# Altium PCB Gyrophare-CarteDeCommande.PCBDOC
Units mm, origin at the board's own origin, x right, y up, seen from the top; angles counter-clockwise.
Board outline 299.72 x 199.9 mm, 2 copper layers (Top Layer, Bottom Layer); 39 components, 43 nets, 144 pads, 42 vias.
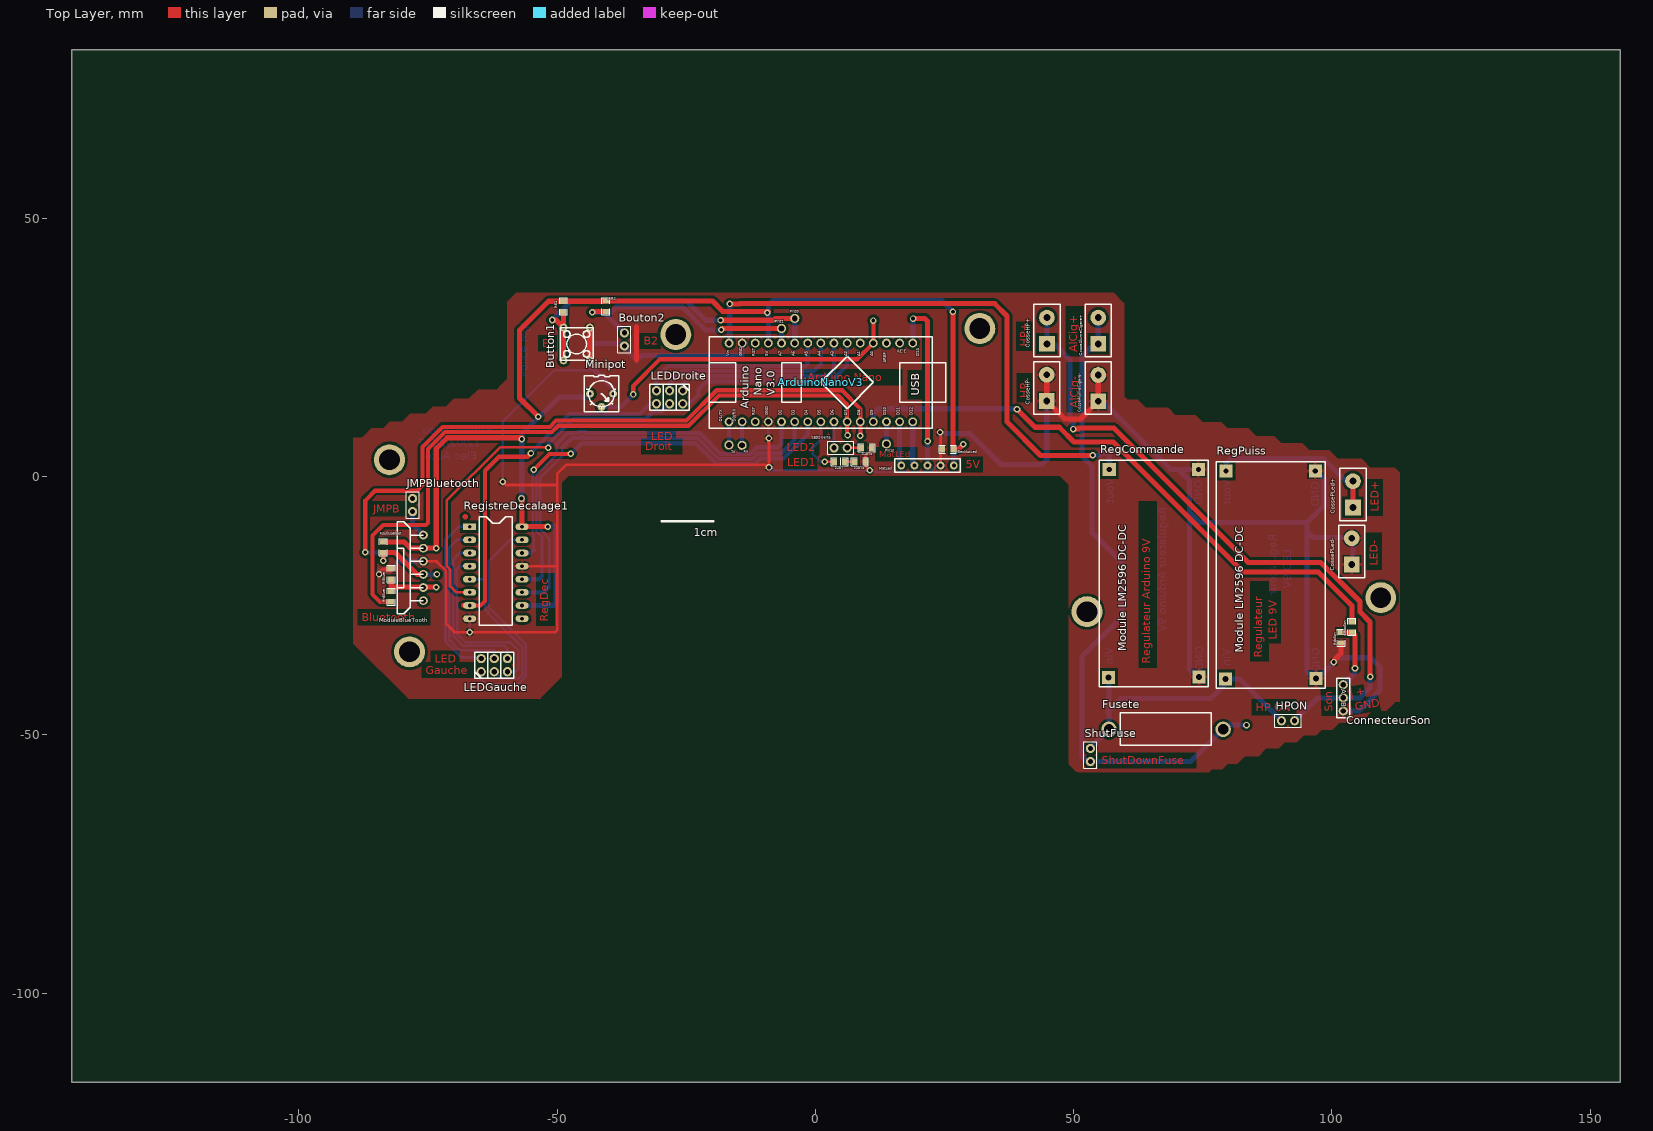
[diagram p0: Top Layer view]
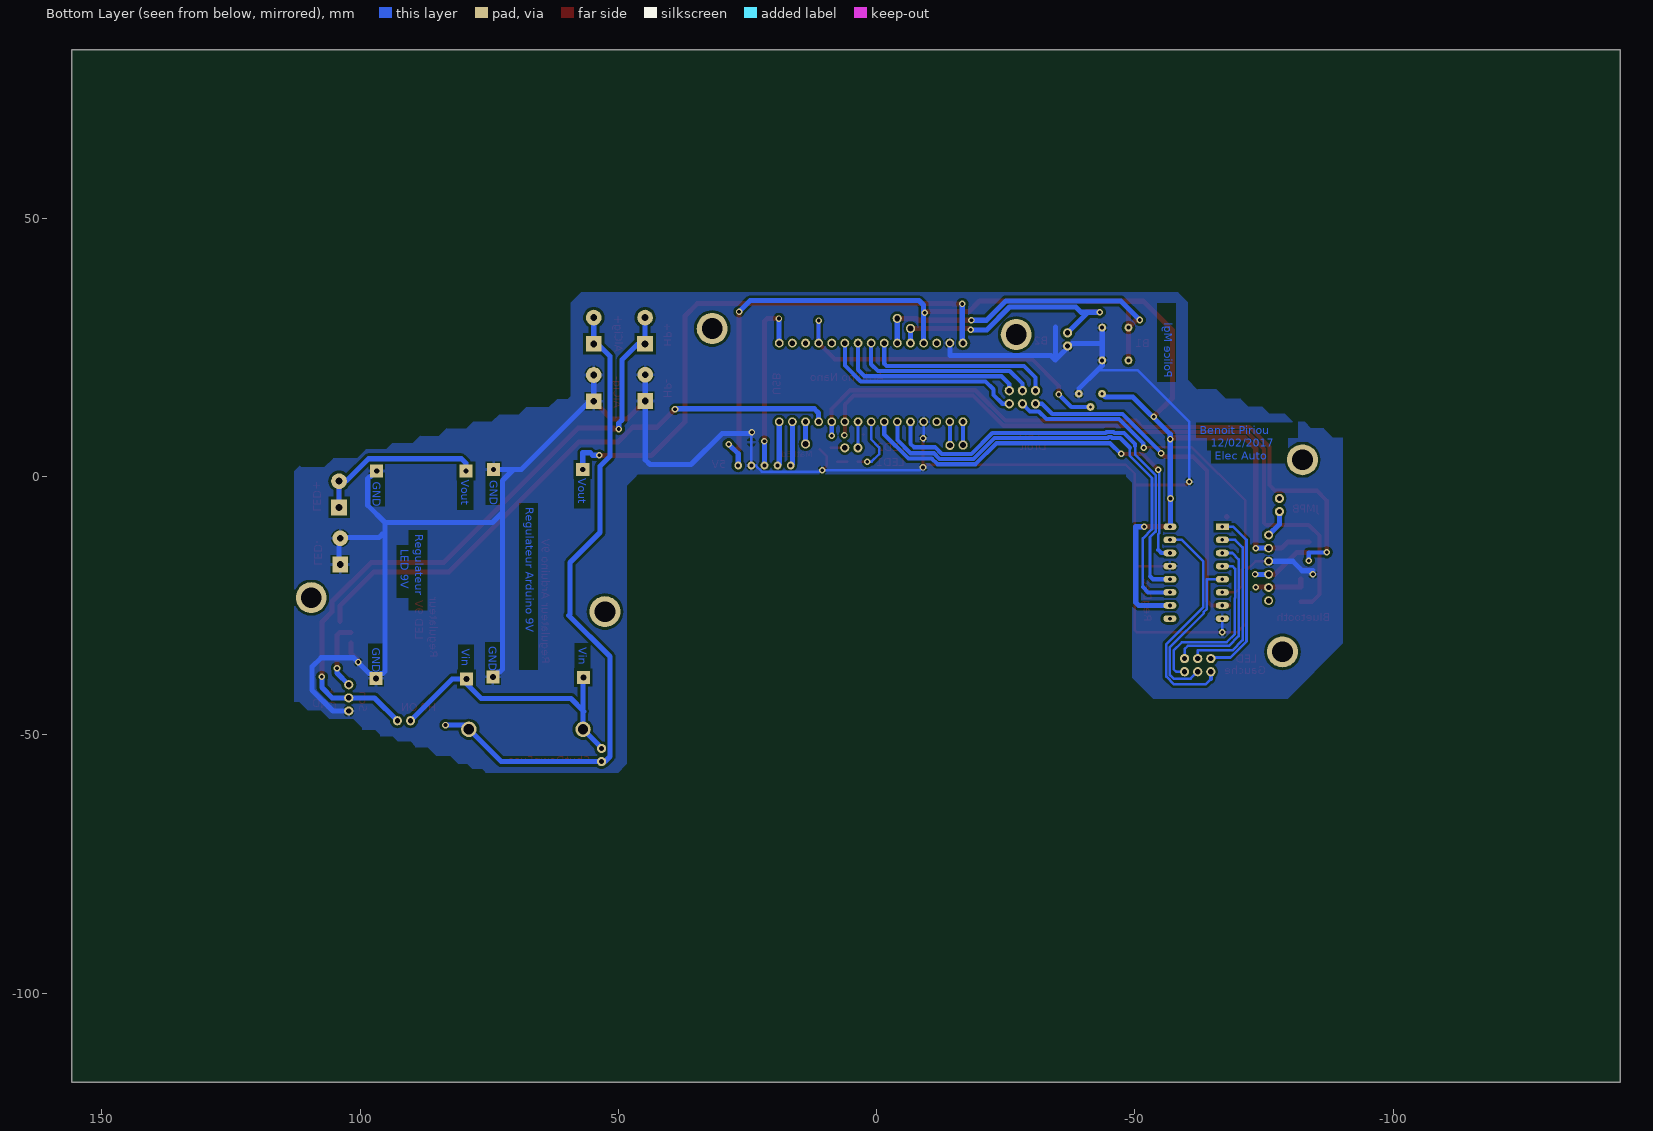
[diagram p1: Bottom Layer view, seen from below]

## Layer stack, top to bottom
Top Solder: solder mask 0.0102, Solder Resist, Dk 3.5
Top Layer: signal copper 0.0356
Dielectric1: dielectric 0.32, FR-4, Dk 4.8
Bottom Layer: signal copper 0.0356
Bottom Solder: solder mask 0.0102, Solder Resist, Dk 3.5

## Board outline
-143.936,-117.276 155.784,-117.276 155.784,82.622 -143.936,82.622

## Design rules (kind name [scope] priority, off if disabled: settings)
Clearance Clearance_bottom_polygon [OnLayer('Bottom Layer') Or OnLayer('Multi-Layer') vs OnLayer('Bottom Layer')  And  InPoly] p1: gap=0.508
Clearance Clearance_top_polygon [OnLayer('Top Layer')  Or OnLayer('Multi-Layer') vs OnLayer('Top Layer') And InPoly] p2: gap=0.508
Clearance Clearance_bottom [OnLayer('Bottom Layer') Or OnLayer('Multi-Layer') vs OnLayer('Bottom Layer')  And Not InPoly] p3: gap=0.203
Clearance Clearance_top [OnLayer('Top Layer')  Or OnLayer('Multi-Layer') vs OnLayer('Top Layer') And Not InPoly] p4: gap=0.203
Clearance Clearance_pad_to_pad [OnLayer('Multi-Layer') vs OnLayer('Multi-Layer')] p5: gap=0.254
ComponentClearance ComponentClearance_bottom [OnLayer('Bottom Overlay') vs OnLayer('Bottom Overlay')] p1: gap=0 collisioncheckmode=3 verticalgap=0.254 showdistances=FALSE
ComponentClearance ComponentClearance_top [OnLayer('Top Overlay') vs OnLayer('Top Overlay')] p2: gap=0 collisioncheckmode=3 verticalgap=0.254 showdistances=FALSE
FabricationTestPointUsage TestPointUsage [All] p1: valid=0 allowmultiple=FALSE
FabricationTestpoint Testpoint [All] p1: side=3 testpointundercomponent=TRUE minsize=1.016 maxsize=2.54 preferedsize=1.524 minholesize=0 maxholesize=1.016 preferedholesize=0.813 testpointgrid=0.025 allowsidetop=TRUE allowsidebottom=TRUE usegrid=TRUE gridtolerance=0
HoleSize [All] p1: absolutevalues=TRUE maxlimit=25.4 minlimit=0.406 maxpercent=80.000 minpercent=20.000
MinimumAnnularRing [PadXSize_AllLayers = PadYSize_AllLayers] p1: minimumring=0.254
PermittedLayers [All] p1: toplayerpermitted=TRUE bottomlayerpermitted=TRUE
PolygonConnect [All] p1: connectstyle=Relief reliefconductorwidth=0.61 reliefentries=4 polygonreliefangle="90 Angle" airgapwidth=0.254
RoutingVias [All] p1: holewidth=0.406 width=0.813 viastyle="Through Hole" minholewidth=0.4 minwidth=0.8 maxholewidth=0.6 maxwidth=10
SMDToPlane [All] p1: distance=0
SolderMaskExpansion [All] p1: expansion=0.102
ViasUnderSMD [All] p1: allowed=FALSE
Width Width_botom_top [OnLayer('Bottom Layer') or OnLayer('Top Layer')] p1: maxlimit=254 minlimit=0.5 preferedwidth=0.813 minimp=50.000000 maximp=50.000000 favimp=50.000000
25 further rules are at their usual default settings.

## Components (designator, comment, footprint, x,y, rotation, side; value= is the part's Value field where it differs from the comment)
ArduinoNanoV3 "Arduino Nano" "Arduino Nano FootPrint" -1.48,18.24 r90 top
Bouton2 "JUMPER2" JMP2-100 -36.97,27.84 r270 top
Button1 "SwitchButton" SwitchMedium -46.21,25.68 r90 top
ConnecteurSon "JUMPER3" JMP3-100 102.18,-40.28 r270 top
CosseAlumeCigare+ "CosseAlumeCigare+" POWER2 54.75,25.71 r90 top
CosseAlumeCigare- "CosseAlumeCigare+" POWER2 54.75,14.59 r90 top
CosseHP+ "comment" POWER2 44.82,25.71 r90 top
CosseHP- "comment" POWER2 44.79,14.64 r90 top
CossePLed+ "comment" POWER2 104.06,-5.95 r90 top
CossePLed- "comment" POWER2 103.84,-17 r90 top
DecMatLed "CAP" 0805 26.62,5.28 r180 top
Fusete "fuse" FUSE 63.81,-48.91 r0 top
HPON "JUMPER2" JMP2-100 92.76,-47.25 r180 top
JMPBluetooth "JMP2" JMP2-100 -77.97,-4.22 r270 top
LED1 "Orange" LED0805 5.699,2.917 r180 top
"LED2 Verte" "JUMPER2" JMP2-100 3.618,5.58 r0 top
LEDDroite "Co-Dip6" DIP6 -28.22,15.38 r270 top
LEDGauche "Co-Dip6" DIP6 -62.16,-36.49 r90 top
MatLed "CoMatLed" ADAPTATEURDIP5 21.71,2.17 r270 top
Minipot "Vol" MiniTrimer -41.4,16.04 r180 top
ModuleBlueTooth "HC-05" "HC-05 Droit" -78.42,-17.65 r180 top
Pin10 "PIN" TESTPOINT 13.74,6.34 r90 top
Pin20 "PIN" TESTPOINT -3.99,30.63 r90 top
Pin21 "PIN" TESTPOINT -6.57,28.69 r90 top
RB1 "RES" 0805 -48.77,31.93 r90 top
RB2 "RES" 0805 -40.6,31.96 r90 top
RdoSon "RES" 0805 101.77,-32.2 r90 top
RegCommande "Regulateur Commande" "Module LM2596 DC-DC" 65.51,-18.69 r90 top
RegistreDecalage1 "Registreadecalage" 74HC595 -61.86,-16.05 r0 top
RegPuiss "Regulateur Puissant" "Module LM2596 DC-DC" 88.14,-18.98 r90 top
RhBluet "RES" 0805 -82.1,-22.19 r270 top
RlBluet "RES" 0805 -82.1,-17.83 r270 top
RLED1 "RES" 0805 9.64,2.92 r180 top
RLED2 "RES" 0805 10.93,5.61 r180 top
RpullUpBluet "RES" 0805 -83.64,-14.66 r90 top
RupSon "RES" 0805 103.85,-30.1 r90 top
RX "PIN" TESTPOINT -14.19,6.06 r0 top
ShutFuse "JUMPER2" JMP2-100 53.24,-52.62 r270 top
TX "PIN" TESTPOINT -16.73,6.13 r0 top

## Footprints (in the part's own frame and the unit in brackets; to place one, negate y for a bottom-side part, rotate by r counter-clockwise, add the part's x,y. Pads: shape width x height; smd on the part's side, far side on the other; paste and mask are expansions set on the pad)
74HC595 [mil]
  rect 100x50 hole 28: 1(-200,250)
  oval 100x50 hole 28: 2(-200,150) 3(-200,50) 4(-200,-50) 5(-200,-150) 6(-200,-250) 7(-200,-350) 8(-200,-450) 9(200,-450) 10(200,-350) 11(200,-250) 12(200,-150) 13(200,-50) 14(200,50) 15(200,150) 16(200,250)
  silkscreen extent -125,-500 125,325
0805 [mil]
  rect 40x50 smd: 1(0,0) 2(80,0)
  silkscreen extent -25,-30 105,30
ADAPTATEURDIP5 [mil]
  round 60 hole 30: 1(0,200) 2(0,100) 3(0,0) 4(0,-100) 5(0,-200)
  silkscreen extent -50,-250 50,250
"Arduino Nano FootPrint" [mm]
  round 1.7 hole 1.04: 1(-7.62,15.24) 2(-7.62,12.7) 3(-7.62,10.16) 4(-7.62,7.62) 5(-7.62,5.08) 6(-7.62,2.54) 7(-7.62,0) 8(-7.62,-2.54) 9(-7.62,-5.08) 10(-7.62,-7.62) 11(-7.62,-10.16) 12(-7.62,-12.7) 13(-7.62,-15.24) 14(-7.62,-17.78) 15(-7.62,-20.32) 16(7.62,-20.32) 17(7.62,-17.78) 18(7.62,-15.24) 19(7.62,-12.7) 20(7.62,-10.16) 21(7.62,-7.62) 22(7.62,-5.08) 23(7.62,-2.54) 24(7.62,0) 25(7.62,2.54) 26(7.62,5.08) 27(7.62,7.62) 28(7.62,10.16) 29(7.62,12.7) 30(7.62,15.24)
  silkscreen extent -8.89,-26.67 8.89,19.05
DIP6 [mm]
  round 1.8 hole 1.012: 1(-1.27,2.54) 2(1.27,2.54) 3(-1.27,0) 4(1.27,0) 5(-1.27,-2.54) 6(1.27,-2.54)
  silkscreen extent -2.54,-3.81 2.54,3.81
FUSE [mm]
  round 3 hole 2: 0(-6.985,0) 1(15.113,0)
  silkscreen extent -4.83,-3.05 12.83,3.17
"HC-05 Droit" [mm]
  round 1.7 hole 1.05: 1(-2.54,6.35) 2(-2.54,3.81) 3(-2.54,1.27) 4(-2.54,-1.27) 5(-2.54,-3.81) 6(-2.54,-6.35)
  silkscreen extent -2.54,-8.89 2.54,8.89
JMP2-100 [mil]
  round 70 hole 40: 1(0,0) 2(100,0)
  silkscreen extent -50,-50 150,50
JMP3-100 [mil]
  round 70 hole 40: 1(0,0) 2(200,0) 3(100,0)
  silkscreen extent -50,-50 250,50
LED0805 [mil]
  rect 40x50 smd: A(80,0) K(0,0)
  silkscreen extent -25,-30 105,30
MiniTrimer [mil]
  round 60 hole 23.62: 1(88.58,0) 2(0,100) 3(-88.58,0)
  silkscreen extent -130,-140 130,138
"Module LM2596 DC-DC" [mil]
  rect 100x100 hole 47.24: 1(-795,345) 2(-790,-345)
  rect 100x100 hole 39.37: 3(790,-340) 4(790,340)
  silkscreen extent -865,-415 860,415
POWER2 [mil]
  rect 120x120 hole 52: 1(0,0)
  round 120 hole 52: 2(200,0)
  silkscreen extent -100,-100 300,100
SwitchMedium [mil]
  round 60 hole 30: 1(-125,100) 2(125,100) 3(125,-100) 4(-125,-100)
  silkscreen extent -125,-125 125,125
TESTPOINT [mil]
  round 70 hole 44: 1(0,0)

## Part data
Bouton2 HPON "LED2 Verte" ShutFuse: "cavalier 1 position"
ConnecteurSon: "cavalier 2 positions"
CosseAlumeCigare+ CosseAlumeCigare- CosseHP+ CosseHP- CossePLed+ CossePLed-: library part POWER2, "connecteur alim 2 pôles"
DecMatLed: "capacité non polarisée"
Fusete: library part Fuse
JMPBluetooth: library part JUMPER2, "cavalier 1 position"
LED1: library part LED, "LED 5mm/3mm/CMS"
MatLed: library part DipAdapt5
Minipot: library part MiniPotentiometre
RB1 RB2 RdoSon RhBluet RlBluet RLED1 RLED2 RpullUpBluet RupSon: "resistance"
RegCommande RegPuiss: library part Component_1
RegistreDecalage1: library part 74HC595

## Free pads (board coordinates)
  round 6 hole 4: 0(-82.45,3.27) 0(-78.57,-33.91) 0(-27.03,27.51) 0(31.82,28.67) 0(52.58,-26.13) 0(109.44,-23.43)

## Via types
v1: diameter 1.27, hole 0.711, Top Layer to Bottom Layer, 42 vias

## Nets (pads, with @x,y where several pads share a name; then routed paths per layer and width w, separated by ;. In a path a pad name is that pad's centre, name@x,y a point inside that pad or via, vN(x,y) a via of type N, cw(c..) or ccw(c..) an arc to the next point about the centre after c; other vN are vias at no path point)
5V: ArduinoNanoV3.27 DecMatLed.1 MatLed.1 Minipot.1 ModuleBlueTooth.5 RB1.2 RB2.2 RegistreDecalage1.10 RegistreDecalage1.16 RpullUpBluet.2 | length 265.7
  Top Layer w1: RpullUpBluet.2 -79.592,-12.628 -78.38,-13.84 ModuleBlueTooth.5 -73.42,-13.84 v1(-73.41,-13.83) -73.41,5.39 -71.273,7.527 v1@-56.79,7.527 ; v1@-56.78,-4.44 RegistreDecalage1.16 -56.76,-9.68 v1(-51.84,-9.68) ; v1(-53.62,11.58) -57.29,15.25 -57.29,28.33 -51.66,33.96 -40.632,33.96 RB2.2 -19.942,33.992 -17.93,31.98 v1@-9.12,31.98 ; v1(26.62,31.93) DecMatLed.1 27.65,5.28 v1(28.65,6.28)
  Bottom Layer w1: ModuleBlueTooth.5 -75.87,-13.83 v1(-73.41,-13.83) ; v1@-56.8,7.48 v1@-56.79,7.49 ; RegistreDecalage1.10 -50.74,-24.94 -50.18,-24.38 -50.18,-9.7 -51.82,-9.7 v1(-51.84,-9.68) ; RegistreDecalage1.16 -56.89,-9.59 v1(-56.89,-4.23) -56.85,-4.19 v1(-56.85,7.28) -56.85,8.2 -49.66,15.39 -44.3,15.39 Minipot.1 ; ArduinoNanoV3.27 -9.1,33.21 -8.23,34.08 24.47,34.08 v1(26.62,31.93) ; MatLed.1 26.79,4.42 v1(28.65,6.28)
  other v1: -9.29,31.75
ALIMARDUINO: ArduinoNanoV3.30 RegCommande.4 | length 108.6
  Top Layer w1: v1(-16.59,33.43) -14.7,33.43 -14.64,33.49 34.71,33.49 37.08,31.12 37.08,10.61 43.59,4.1 v1@53.66,4.1
  Bottom Layer w1: ArduinoNanoV3.30@-16.59,25.99 v1(-16.59,33.43) ; v1(53.66,4.14) 54.948,4.14 55.424,4.616 56.874,4.616 RegCommande.4
ALIMHP: ConnecteurSon.3 CosseHP+.1 CosseHP+.2 HPON.1 | length 129.1
  Top Layer w1: v1(49.91,9.21) 51.04,9.21 50.84,9.41 57.77,9.41 83.79,-16.61 97.84,-16.61 105.41,-24.18 105.41,-26.17 107.38,-28.14 v1(107.38,-38.74)
  Bottom Layer w1: CosseHP+.2 CosseHP+.1 46.17,25.71 49.26,22.62 49.26,10.99 49.91,10.34 v1(49.91,9.21) ; HPON.1 97.19,-42.82 ConnecteurSon.3 105.37,-42.82 107.38,-40.81 v1(107.38,-38.74)
ALIMPUISSANCELED: CossePLed+.1 CossePLed+.2 RegPuiss.4 | length 38.4
  Top Layer w1: CossePLed+.1 CossePLed+.2
  Bottom Layer w1: RegPuiss.4 79.504,2.594 80.38,3.47 98.38,3.47 102.72,-0.87 CossePLed+.2 CossePLed+.1
ALUMCIGPROTECT: Fusete.0 HPON.2 RegCommande.1 RegPuiss.1 ShutFuse.1 | length 54.1
  Bottom Layer w1: ShutFuse.1@53.24,-52.495 Fusete.0 RegCommande.1@56.825,-38.961 ; 56.68,-45.45 59.18,-42.95 76.53,-42.95 RegPuiss.1@79.377,-40.103 ; RegPuiss.1 82.143,-39.173 HPON.2
ALUMECIGARE+: CosseAlumeCigare+.1 CosseAlumeCigare+.2 Fusete.1 ShutFuse.2 | length 126.2
  Bottom Layer w1: CosseAlumeCigare+.1@54.01,25.71 51.62,23.32 51.62,3.94 53.53,2.03 53.53,-10.79 59.34,-16.6 59.34,-26.6 ; CosseAlumeCigare+.1 CosseAlumeCigare+.2 ; 59.59,-26.85 51.62,-34.82 51.62,-54.2 52.58,-55.16 ShutFuse.2 72.673,-55.16 Fusete.1 ; Fusete.1@79.753,-48.08 v1(83.45,-48.08)
BUTTON1: ArduinoNanoV3.25 Button1.1 Button1.2 Pin20.1 RB1.1 | length 67.2
  Top Layer w1: v1(-50.94,30.33) -50.225,30.33 Button1.2 ; RB1.1 -48.75,31.91 Button1.2 ; Button1.1 Button1.2 ; v1(-18.36,30.29) -8.06,30.29 -7.72,30.63 Pin20.1
  Bottom Layer w1: v1(-50.94,30.33) -47.25,34.02 -25.02,34.02 -21.29,30.29 v1(-18.36,30.29) v1@-18.26,30.29 ; ArduinoNanoV3.25@-3.99,25.89 Pin20.1
BUTTON2: ArduinoNanoV3.26 Bouton2.1 Pin21.1 RB2.1 | length 50
  Top Layer w1: v1(-43.21,31.82) -43.07,31.96 RB2.1 ; v1(-18.21,28.44) -17.96,28.69 Pin21.1
  Bottom Layer w1: v1(-43.21,31.82) -40.95,31.82 ; Bouton2.1 -40.95,31.82 ; v1@-18.42,28.41 -21.32,28.41 -25.727,32.817 -38.563,32.817 -39.56,31.82 -40.95,31.82 ; ArduinoNanoV3.26@-6.55,25.86 Pin21.1@-6.55,28.81
COMMANDEHP: ConnecteurSon.1 RdoSon.2 RupSon.1 | length 13.4
  Top Layer w1: RdoSon.2 103.918,-30.168 104.46,-30.71 v1(104.46,-37.07)
  Bottom Layer w1: ConnecteurSon.1 104.46,-38 v1(104.46,-37.07)
EN: JMPBluetooth.2 ModuleBlueTooth.6 | length 5.4
  Bottom Layer w1: JMPBluetooth.2 -77.97,-9.21 ModuleBlueTooth.6
GND: ArduinoNanoV3.4 ArduinoNanoV3.29 Bouton2.2 Button1.3 Button1.4 ConnecteurSon.2 CosseAlumeCigare-.1 CosseAlumeCigare-.2 CosseHP-.1 CosseHP-.2 CossePLed-.1 CossePLed-.2 DecMatLed.2 MatLed.2 Minipot.3 ModuleBlueTooth.4 RdoSon.1 RegCommande.2 RegCommande.3 RegistreDecalage1.8 RegistreDecalage1.13 RegPuiss.2 RegPuiss.3 RlBluet.1 RLED1.1 RLED2.1 | length 551.4
  Top Layer w0.5: ModuleBlueTooth.4 -73.35,-16.38 -71.43,-18.3 -71.43,-28.54 -69.87,-30.1 v1(-66.94,-30.1) -50.35,-30.1 -49.97,-29.72 -49.97,-17.33 ; v1(-60.51,-1.01) -59.91,-1.61 -49.97,-1.61 ; RegistreDecalage1.13 -56.77,-17.33 -49.97,-17.33 ; v1@-8.98,7.42 v1(-8.98,1.78) -9.48,2.28 -48.27,2.28 -49.97,0.58 -49.97,-1.61 ; v1(10.5,1.25) 9.64,2.11 RLED1.1 9.64,3.94 RLED2.1@11.03,5.33 ; v1(24.13,8.57) 24.25,8.45 DecMatLed.2@24.25,5.028 ; MatLed.2 DecMatLed.2@24.25,4.67 ; -49.97,-17.33 -49.97,-1.61
  Top Layer w1: v1(-84.47,-18.91) -83.641,-18.081 -82.351,-18.081 RlBluet.1 ; Button1.4 Button1.3 ; -34.6,22.585 -34.6,28.935 ; CosseHP-.2 CosseHP-.1 48.25,11.18 51.34,11.18 CosseAlumeCigare-.1 CosseAlumeCigare-.2@54.75,19.62 ; v1@100.39,-35.57 101.77,-34.19 RdoSon.1
  Bottom Layer w0.5: v1(-66.94,-30.1) RegistreDecalage1.8 ; v1(-60.51,-1.01) -60.51,10.66 -50.575,20.595 -42.735,20.595 ; v1@-9.14,6.87 -9.1,6.91 ArduinoNanoV3.4 ; v1(-8.98,1.78) -8.45,1.25 v1(10.5,1.25) 10.805,0.945 18.57,0.945 18.58,0.955 22.213,0.955 23.429,2.17 MatLed.2 v1@24.25,8.37
  Bottom Layer w1: v1(-84.47,-18.91) -84.47,-18.22 -82.4,-18.22 -80.56,-16.38 ModuleBlueTooth.4 ; Button1.3 -43.67,25.78 ; Minipot.3 -39.15,17.01 -42.735,20.595 -43.67,21.53 Button1.4 -43.67,25.78 ; -34.6,28.935 -34.6,22.585 ; ArduinoNanoV3.29 -14.18,23.45 -33.735,23.45 -34.6,22.585 ; v1@24.25,8.37 29.87,8.37 35.9,2.34 43.87,2.34 44.79,3.26 CosseHP-.1 CosseHP-.2 ; CosseAlumeCigare-.2 CosseAlumeCigare-.1 55.59,14.59 68.804,1.376 70.29,1.376 ; RegCommande.3 70.29,1.376 ; RegCommande.2 73.324,-37.807 72.966,-37.807 72.427,-37.268 72.427,-6.947 ; RegPuiss.3@97.851,0.011 98.083,0.011 98.495,-0.401 98.495,-5.554 95.184,-8.865 ; ConnecteurSon.2 105.24,-45.36 109.27,-41.33 109.27,-36.81 107.52,-35.06 101.247,-35.06 98.21,-38.097 97.852,-38.097 RegPuiss.2 95.954,-38.097 95.596,-38.097 95.184,-37.685 95.184,-11.15 ; CossePLed-.1@104.42,-17.53 104.06,-17.17 104.06,-12.37 103.45,-11.76 96.32,-11.76 95.71,-11.15 95.184,-11.15 ; -43.67,25.78 -37.795,25.78 -34.6,22.585 ; 70.29,1.376 72.427,-0.761 72.427,-6.947 ; 72.427,-6.947 74.345,-8.865 95.184,-8.865 ; 95.184,-11.15 95.184,-8.865
  other v1: 100.35,-35.89 -8.99,7.42
LED1: ArduinoNanoV3.8 LED1.A | length 11.7
  Top Layer w0.5: v1(1.79,2.89) LED1.A@3.64,2.89
  Bottom Layer w0.5: ArduinoNanoV3.8 1.06,7.24 -0.5,5.68 -0.5,4.34 0.95,2.89 v1(1.79,2.89)
LED2: "LED2 Verte.1" ArduinoNanoV3.9 | length 5.2
  Bottom Layer w0.5: 3.38,5.56 3.6,5.78 ArduinoNanoV3.9
MATLEDCLK: ArduinoNanoV3.14 MatLed.5 | length 8.1
  Bottom Layer w1: MatLed.5@16.3,2.5 ArduinoNanoV3.14
MATLEDCS: ArduinoNanoV3.15 MatLed.4 | length 8.1
  Bottom Layer w1: MatLed.4@18.84,2.5 ArduinoNanoV3.15
MATLEDDIN: ArduinoNanoV3.16 MatLed.3 | length 35.7
  Top Layer w1: v1(18.91,30.61) 21.18,30.61 21.71,30.08 v1(21.71,6.84)
  Bottom Layer w1: ArduinoNanoV3.16 18.91,25.93 v1(18.91,30.61) ; MatLed.3 v1(21.71,6.84)
NetArduinoNanoV3_1: ArduinoNanoV3.1 TX.1 | length 4.5
  Bottom Layer w0.8: TX.1@-16.72,6.14 ArduinoNanoV3.1
NetArduinoNanoV3_2: ArduinoNanoV3.2 RX.1 | length 4.6
  Bottom Layer w0.5: RX.1 RX.1@-14.18,6.07
  Bottom Layer w0.8: RX.1@-14.18,6.07 ArduinoNanoV3.2
NetArduinoNanoV3_13: ArduinoNanoV3.13 Pin10.1 | length 4.3
  Bottom Layer w1: Pin10.1 13.76,6.36 ArduinoNanoV3.13
NetLED1_K: LED1.K RLED1.2 | length 1.9
  Top Layer w0.5: LED1.K RLED1.2@7.605,2.917
"NetLED2 Verte_2": "LED2 Verte.2" RLED2.2 | length 3.2
  Top Layer w0.5: 5.74,5.61 RLED2.2
P1L: LEDGauche.2 RegistreDecalage1.1 | length 33.7
  Bottom Layer w0.5: RegistreDecalage1.1 -69.06,-9.7 -71.61,-12.25 -71.61,-31.91 -68.51,-35.01 -64.91,-35.01 LEDGauche.2
P1R: LEDGauche.1 RegistreDecalage1.15 | length 44.5
  Bottom Layer w0.5: -64.7,-39.16 -63.64,-40.22 -57.57,-40.22 -56.077,-38.727 -56.077,-32.436 -63.21,-25.302 -63.21,-16.37 -59.08,-12.24 RegistreDecalage1.15
  Bottom Layer w0.8: -64.7,-39.16 LEDGauche.1
P2L: LEDGauche.6 RegistreDecalage1.3 | length 32.5
  Bottom Layer w0.5: RegistreDecalage1.3 -68.87,-14.78 -70.1,-16.01 -70.1,-30.87 -68.21,-32.76 -60.23,-32.76 -59.626,-33.364 LEDGauche.6@-59.626,-35.22 ; LEDGauche.6@-59.626,-34.569 -59.62,-34.576 LEDGauche.6
P2R: LEDGauche.4 RegistreDecalage1.2 | length 33.5
  Bottom Layer w0.5: RegistreDecalage1.2 -69.41,-12.24 -70.84,-13.67 -70.84,-31.64 -68.85,-33.63 -62.19,-33.63 -62.16,-33.66 LEDGauche.4
P3L: LEDGauche.3 RegistreDecalage1.5 | length 30.8
  Bottom Layer w0.5: RegistreDecalage1.5 -63.913,-19.86 -63.913,-25.594 -63.33,-26.177 -63.33,-26.45 -56.78,-33 -56.78,-38.39 -57.503,-39.113 -60.807,-39.113 LEDGauche.3
P3R: LEDGauche.5 RegistreDecalage1.4 | length 34.4
  Bottom Layer w0.5: RegistreDecalage1.4 -68.87,-17.32 -69.397,-17.847 -69.397,-23.48 -69.368,-23.509 -69.368,-30.432 -67.743,-32.057 -59.083,-32.057 -57.51,-33.63 -57.51,-37.28 -57.99,-37.76 LEDGauche.5
P4L: LEDDroite.6 RegistreDecalage1.7 | length 68.5
  Top Layer w0.8: -68.23,-24.88 -68.17,-24.94 RegistreDecalage1.7 -64.83,-24.94 -63.97,-24.08 -63.97,1.15 -61.27,3.85 -55.75,3.85 v1(-55.07,4.53)
  Bottom Layer w0.8: v1@-55.15,4.58 -47.595,12.135 -34.005,12.135 -32.03,14.11 LEDDroite.6
P4R: LEDDroite.4 RegistreDecalage1.6 | length 72.3
  Top Layer w0.5: RegistreDecalage1.6 -69.49,-22.4 -70.727,-21.163 -70.727,-17.983 -71.37,-17.34 -71.37,-4.64 -61,5.73 v1@-51.71,5.73
  Bottom Layer w0.8: v1@-51.63,5.8 -51.63,6.451 -46.949,11.132 -32.858,11.132 -31.383,12.607 -29.723,12.607 LEDDroite.4
  other v1: -51.71,5.61
P5L: ArduinoNanoV3.22 LEDDroite.1 | length 36.9
  Bottom Layer w0.8: LEDDroite.1 -25.68,17.92 -24.156,19.444 2.354,19.444 3.6,20.69 ArduinoNanoV3.22
P5R: ArduinoNanoV3.21 LEDDroite.2 | length 39.9
  Bottom Layer w0.8: LEDDroite.2 -24.33,14.11 -22.62,15.82 -22.62,16.92 -21.1,18.44 3.07,18.44 6.14,21.51 ArduinoNanoV3.21
P6L: ArduinoNanoV3.24 LEDDroite.5 | length 36.9
  Bottom Layer w0.8: LEDDroite.5 -30.76,19.2 -28.51,21.45 -1.899,21.45 -1.48,21.869 ArduinoNanoV3.24
P6R: ArduinoNanoV3.23 LEDDroite.3 | length 36.3
  Bottom Layer w0.8: LEDDroite.3 -28.22,18.003 -25.776,20.447 -0.253,20.447 1.06,21.76 ArduinoNanoV3.23
POTENTIOMETRE: ArduinoNanoV3.19 Minipot.2 | length 67.4
  Top Layer w0.8: v1(-35.26,15.92) -35.26,17.58 -30.1,22.74 8.1,22.74 ArduinoNanoV3.19 v1(11.22,30.22)
  Bottom Layer w0.8: Minipot.2 -37.68,13.5 v1(-35.26,15.92) ; ArduinoNanoV3.19 v1(11.22,30.22)
REGDECA_RCLK: ArduinoNanoV3.5 RegistreDecalage1.12 | length 83
  Bottom Layer w0.5: -52.93,-19.28 -52.93,-11.72 -54.013,-10.637 -54.013,0.308 -50.04,4.281 -50.04,5.92
  Bottom Layer w0.8: RegistreDecalage1.12 -53.51,-19.86 -52.93,-19.28 ; -50.04,5.92 -50.04,6.3 -47.86,8.48 -46.017,8.48 -45.852,8.646 -44.521,8.646 -44.355,8.48 -22.39,8.48 -18.33,4.42 -12.61,4.42 -11.33,5.7 -7.22,5.7 -6.56,6.36 ArduinoNanoV3.5
REGDECA_SER: ArduinoNanoV3.7 RegistreDecalage1.14 | length 80.1
  Top Layer w0.8: v1(-54.53,1.33) -51.488,4.372 -47.418,4.372 v1(-47.35,4.44)
  Bottom Layer w0.5: -54.53,-14.2 -54.53,-11.114 -54.716,-10.928 -54.716,1.144 v1(-54.53,1.33)
  Bottom Layer w0.8: RegistreDecalage1.14 -55.11,-14.78 -54.53,-14.2 ; v1@-47.49,4.17 -47.285,4.375 -45.186,6.474 -23.221,6.474 -19.161,2.414 -11.779,2.414 -10.666,3.527 -6.144,3.527 -1.48,8.191 ArduinoNanoV3.7
REGDECA_SRCLK: ArduinoNanoV3.6 RegistreDecalage1.11 | length 87.8
  Bottom Layer w0.5: -51.55,-21.38 -51.55,-11.937 -53.31,-10.177 -53.31,-0.26 -49.037,4.013 -49.037,5.6
  Bottom Layer w0.8: RegistreDecalage1.11 -52.57,-22.4 -51.55,-21.38 ; -49.037,5.6 -47.16,7.477 -45.602,7.477 -45.436,7.642 -44.937,7.642 -44.771,7.477 -22.806,7.477 -18.746,3.417 -12.194,3.417 -11.081,4.53 -6.56,4.53 -4.02,7.07 ArduinoNanoV3.6
RXB: ModuleBlueTooth.2 RhBluet.1 RlBluet.2 | length 10.2
  Top Layer w1: RlBluet.2 -82.1,-21.39 v1(-73.39,-21.39)
RXB_ARDUINO: ArduinoNanoV3.10 RhBluet.2 | length 133.8
  Top Layer w0.8: RhBluet.2 -84.262,-24.222 -85.708,-22.776 -85.708,-11.418 -83.66,-9.37 -75.42,-9.37 -75.02,-8.97 -75.02,5.34 -71.73,8.63 -50.99,8.63 -49.77,9.85 -24.55,9.85 -18.68,15.72 4.43,15.72 6.14,14.01 ArduinoNanoV3.10 6.14,8.1 v1(6.23,8.01)
SON: ArduinoNanoV3.12 RupSon.2 | length 114
  Top Layer w1: v1@38.97,13.16 v1@38.91,13.16 ; v1(39.03,13.04) v1@38.91,13.16 ; RupSon.2 103.85,-24.98 97.33,-18.46 82.82,-18.46 57.67,6.69 50.08,6.69 47.22,9.55 42.52,9.55 v1@38.91,13.16
  Bottom Layer w1: ArduinoNanoV3.12 11.22,12.31 12.07,13.16 38.91,13.16 v1(39.03,13.04)
STATE: ModuleBlueTooth.1
TXB: ArduinoNanoV3.11 ModuleBlueTooth.3 RpullUpBluet.1 | length 147.3
  Top Layer w0.8: v1(-87.13,-14.65) -87.13,-4.58 -85.278,-2.728 -77.151,-2.728 -76.023,-1.6 -76.023,5.756 -72.146,9.633 -51.406,9.633 -50.186,10.853 -24.966,10.853 -19.096,16.723 5.117,16.723 8.71,13.13 v1(8.71,7.92) ; v1(-83.66,-16.26) -83.66,-14.68 RpullUpBluet.1
  Top Layer w1: RpullUpBluet.1 -81.35,-14.66 -77.09,-18.92 ModuleBlueTooth.3
  Bottom Layer w0.8: v1(-87.13,-14.65) -83.66,-14.65 v1(-83.66,-16.26) ; ArduinoNanoV3.11 8.68,7.95 v1(8.71,7.92)
  Bottom Layer w1: ModuleBlueTooth.3 v1(-73.26,-18.92)
VCC: JMPBluetooth.1
pads on no net: ArduinoNanoV3.3 ArduinoNanoV3.17 ArduinoNanoV3.18 ArduinoNanoV3.20 ArduinoNanoV3.28 RegistreDecalage1.9
copper on no net: | length 0.1
  Top Layer w1: -67.85,-7.76 -67.78,-7.76 -67.76,-7.78

## Polygon pours and split planes (outlines as drawn)
GND on Top Layer "Top Overlay-No Net" (solid, pour order 3): -89.48,7.49 -89.44,7.45 -89.44,-32.22 -89.44,-32.31 -79,-42.75 -78.79,-42.96 -53.13,-42.96 -53.13,-42.79 -49.15,-38.81 -49.11,-38.77 -49.11,-1.3 -49.11,-1.17 -47.78,0.16 47.15,0.16 47.31,0.16 49.01,-1.54 49.01,-55.68 49.05,-55.72 50.46,-57.13 50.75,-57.13 50.84,-57.22 76.21,-57.22 76.75,-56.68 77.87,-56.68 78.74,-56.68 79.65,-55.77 79.82,-55.6 81.35,-55.6 81.68,-55.6 82.63,-54.65 83.17,-54.11 84.66,-54.11 85.78,-54.11 87.03,-52.86 87.27,-52.62 88.97,-52.62 89.67,-52.62 90.59,-51.7 90.88,-51.41 92.62,-51.41 93.17,-51.41 94.24,-50.34 94.53,-50.05 96.69,-50.05 96.93,-50.05 97.93,-49.05 97.97,-49.01 99.09,-49.01 100.05,-49.01 101.25,-47.81 101.38,-47.68 102.82,-47.68 103.44,-47.68 104.35,-46.77 104.47,-46.65 106.18,-46.65 106.54,-46.65 107.79,-45.4 107.87,-45.32 109.25,-45.32 110.53,-45.32 111.73,-44.12 112.23,-43.62 113.14,-43.62 113.14,0.82 113.06,0.9 112.19,1.77 109.49,1.77 107.42,1.77 106.01,3.18 105.72,3.47 102.94,3.47 101.13,3.47 99.88,4.72 99.47,5.13 96.64,5.13 95.57,5.13 94.45,6.25 94.24,6.46 91.21,6.46 90.22,6.46 89.02,7.66 88.86,7.82 86.03,7.82 85.33,7.82 84.08,9.07 83.79,9.36 81.26,9.36 79.73,9.36 78.74,10.35 78.53,10.56 76.29,10.56 74.96,10.56 73.72,11.8 73.59,11.93 71.07,11.93 69.69,11.93 68.37,13.25 68.28,13.34 65.35,13.34 63.93,13.34 62.61,14.66 62.36,14.91 60.25,14.91 60.25,15.04 59.71,15.58 59.75,15.62 59.75,33.57 59.71,33.57 57.72,35.56 57.64,35.64 -57.77,35.64 -57.89,35.64 -59.76,33.77 -59.68,33.69 -59.68,18.73 -59.85,18.73 -60.72,17.86 -61.72,16.86 -64.28,16.86 -65.28,16.86 -66.69,15.45 -67.06,15.08 -69.79,15.08 -70,15.08 -71.2,13.88 -71.53,13.55 -73.69,13.55 -74.1,13.55 -75.06,12.59 -75.51,12.14 -77.96,12.14 -78.45,12.14 -79.62,10.97 -79.95,10.64 -81.82,10.64 -82.36,10.64 -83.52,9.48 -83.64,9.36 -85.3,9.36 -85.96,9.36 -87.37,7.95 -87.83,7.49 -89.4,7.49
GND on Bottom Layer "Top Overlay-No Net" (solid, pour order 5): -90.256,7.542 -90.256,-32.238 -89.976,-32.518 -79.546,-42.948 -79.436,-42.948 -53.616,-42.948 -53.566,-42.998 -49.476,-38.908 -49.476,-38.638 -49.476,-1.178 -48.316,-0.018 -48.316,0.422 46.194,0.422 46.744,-0.128 48.294,-1.678 48.344,-1.678 48.344,-55.578 48.514,-55.748 50.054,-57.288 75.654,-57.288 75.874,-57.068 76.364,-56.578 76.374,-56.578 78.254,-56.578 79.244,-55.588 79.244,-55.578 80.954,-55.578 81.064,-55.468 82.494,-54.038 82.504,-54.038 85.204,-54.038 86.584,-52.658 86.864,-52.378 89.284,-52.378 89.284,-52.158 90.114,-51.328 90.224,-51.218 92.324,-51.218 92.654,-51.218 93.644,-50.228 96.124,-50.228 96.124,-49.958 97.064,-49.018 99.544,-49.018 99.544,-48.628 100.594,-47.578 101.304,-46.868 103.244,-46.868 105.944,-46.868 107.274,-45.538 107.604,-45.208 109.594,-45.208 110.144,-45.208 111.684,-43.668 111.794,-43.558 112.684,-43.558 112.684,1.072 111.684,2.072 111.414,1.802 106.884,1.802 106.884,1.812 105.204,3.492 105.134,3.562 100.614,3.562 100.584,3.562 98.994,5.152 98.874,5.272 95.044,5.272 94.924,5.272 93.714,6.482 93.684,6.512 89.684,6.512 89.684,6.582 88.374,7.892 88.304,7.822 84.724,7.822 84.724,7.852 83.184,9.392 83.084,9.292 79.324,9.292 79.324,9.342 78.034,10.632 78.004,10.602 74.424,10.602 74.424,10.682 73.094,12.012 73.024,11.942 69.284,11.942 67.834,13.392 67.814,13.412 63.474,13.412 63.454,13.412 61.864,15.002 61.814,14.952 59.824,14.952 59.824,14.962 59.194,15.592 59.244,15.642 59.244,33.632 59.234,33.632 57.134,35.732 57.064,35.662 -58.416,35.662 -58.416,35.592 -60.166,33.842 -60.216,33.792 -60.216,18.862 -60.216,18.762 -62.106,16.872 -62.176,16.942 -65.736,16.942 -67.556,15.122 -70.536,15.122 -70.536,15.022 -71.986,13.572 -72.006,13.552 -74.606,13.552 -74.676,13.552 -76.036,12.192 -76.056,12.172 -79.006,12.172 -80.526,10.652 -80.546,10.632 -82.886,10.632 -82.886,10.602 -84.076,9.412 -84.146,9.342 -86.566,9.342 -86.566,9.282 -88.336,7.512 -88.386,7.562 -90.216,7.562

## Other copper
Top Layer:
  text "B2" at -33.27,25.51 h1.52
  text "HP+" at 41.21,25.17 h1.52 r90
  text "B1" at -52.87,25.07 h1.52
  text "AlCig+" at 50.7,24.07 h1.52 r90
  text "Arduino Nano" at -1.44,18.47 h1.52
  text "USB" at 20.12,15.75 h1.52 r90
  text "HP-" at 41.25,15.17 h1.52 r90
  text "AlCig-" at 50.91,13.25 h1.52 r90
  text "+" at 2.12,7.82 h0.8
  text "LED" at -31.82,7.06 h1.52
  text "Droit" at -32.93,5.09 h1.52
  text "LED2" at -5.59,4.95 h1.52
  text "MatLEd" at 12.34,3.72 h1.2
  text "LED1" at -5.45,2.01 h1.52
  text "5V" at 29.07,1.61 h1.52
  text "LED+" at 109.04,-6.84 h1.52 r90
  text "JMPB" at -85.57,-6.98 h1.52
  text "LED-" at 108.85,-17.22 h1.52 r90
  text "Bluetooth" at -87.8,-27.97 h1.52
  text "RegDec" at -51.75,-28.09 h1.52 r90
  text "LED 9V" at 89.3,-31.53 h1.52 r90
  text "Regulateur" at 86.51,-35.01 h1.52 r90
  text "LED" at -73.72,-36.03 h1.52
  text "Regulateur Arduino 9V" at 64.85,-36.22 h1.52 r90
  text "Gauche" at -75.42,-38.21 h1.52
  text "+" at 104.78,-42.48 h1.52 r10
  text "GND" at 104.62,-45.34 h1.52 r10
  text "HP ON" at 85.22,-45.4 h1.52
  text "Son" at 100.17,-45.52 h1.52 r91.29
  text "ShutDownFuse" at 55.47,-55.71 h1.52
Bottom Layer:
  text "Police Mgl" at -55.64,19.11 h1.52 r90
  text "Benoit Piriou" at -62.59,8.24 h1.52
  text "12/02/2017" at -64.69,5.76 h1.52
  text "Elec Auto" at -65.46,3.28 h1.52
  text "Regulateur Arduino 9V" at 67.87,-5.91 h1.52 r90
  text "Regulateur" at 89.28,-11.16 h1.52 r90
  text "LED 9V" at 92.1,-14.05 h1.52 r90

## Silkscreen, mask and mechanical layers (free items; w line width, h text height)
Top Overlay:
  lines w0.5: -29.76,-8.64 -19.76,-8.64
  text "1cm" at -23.58,-11.53 h1.52
Mechanical 1:
  lines w1: -78.99,-42.94 -89.51,-32.42 -89.51,7.643 -59.82,18.45 -59.82,33.69 -57.92,35.59 57.92,35.59 59.82,33.69 59.82,15.171 113.34,1.047 113.34,-43.805 76.285,-57.17 50.53,-57.17 49,-55.64 49,-1.61 47.39,0 0,0 -47.8,0 -49,-1.2 -49,-38.76 -53.25,-43.01 -78.97,-43.01

## Text inside footprints (layer, text, board x,y; h text height)
ArduinoNanoV3: Top Overlay "USB" at 20.11,15.7 h1.52 r90; Top Overlay "Arduino" at -12.91,13.16 h1.52 r90; Top Overlay "Nano" at -10.37,15.7 h1.52 r90; Top Overlay "V3.0" at -7.83,15.7 h1.52 r90; Top Overlay "A7" at -6.56,23.32 h0.6 r90; Top Overlay "A6" at -4.02,23.32 h0.6 r90; Top Overlay "A5" at -1.48,23.32 h0.6 r90; Top Overlay "A4" at 1.06,23.32 h0.6 r90; Top Overlay "A3" at 3.6,23.32 h0.6 r90; Top Overlay "A2" at 6.14,23.32 h0.6 r90; Top Overlay "A1" at 8.68,23.32 h0.6 r90; Top Overlay "A0" at 11.22,23.32 h0.6 r90; Top Overlay "Vin" at -16.72,23.32 h0.6 r90; Top Overlay "GND" at -14.18,23.32 h0.6 r90; Top Overlay "RST" at -11.64,23.32 h0.6 r90; Top Overlay "5V" at -9.1,23.32 h0.6 r90; Top Overlay "AREF" at 13.76,22.05 h0.6 r90; Top Overlay "3.3V" at 17.57,24.59 h0.6 r180; Top Overlay "D13" at 20.11,23.32 h0.6 r90; Top Overlay "D1/TX" at -17.99,10.62 h0.6 r90; Top Overlay "D0/RX" at -15.45,10.62 h0.6 r90; Top Overlay "RST" at -11.64,11.89 h0.6 r90; Top Overlay "GND" at -9.1,11.89 h0.6 r90; Top Overlay "D2" at -6.56,11.89 h0.6 r90; Top Overlay "D3" at -4.02,11.89 h0.6 r90; Top Overlay "D4" at -1.48,11.89 h0.6 r90; Top Overlay "D5" at 1.06,11.89 h0.6 r90; Top Overlay "D6" at 3.6,11.89 h0.6 r90; Top Overlay "D7" at 6.14,11.89 h0.6 r90; Top Overlay "D8" at 8.68,11.89 h0.6 r90; Top Overlay "D9" at 11.22,11.89 h0.6 r90; Top Overlay "D10" at 13.76,11.89 h0.6 r90; Top Overlay "D11" at 16.3,11.89 h0.6 r90; Top Overlay "D12" at 18.84,11.89 h0.6 r90
ConnecteurSon: Top Overlay "A" at 101.799,-41.169 h1.02 r270; Top Overlay "B" at 101.799,-43.709 h1.02 r270
RegCommande: Top Overlay "Module LM2596 DC-DC" at 60.176,-33.803 h1.52 r90; Bottom Layer "Vout" at 57.763,-0.275 h1.52 r90; Bottom Layer "GND" at 74.908,-0.656 h1.52 r90; Bottom Layer "GND" at 75.035,-32.787 h1.52 r90; Bottom Layer "Vin" at 57.636,-33.041 h1.52 r90
RegPuiss: Top Overlay "Module LM2596 DC-DC" at 82.806,-34.093 h1.52 r90; Bottom Layer "Vout" at 80.393,-0.565 h1.52 r90; Bottom Layer "GND" at 97.538,-0.946 h1.52 r90; Bottom Layer "GND" at 97.665,-33.077 h1.52 r90; Bottom Layer "Vin" at 80.266,-33.331 h1.52 r90